# EAGLE board AK9750 Panel - x11 (EAGLE 7.7.0)
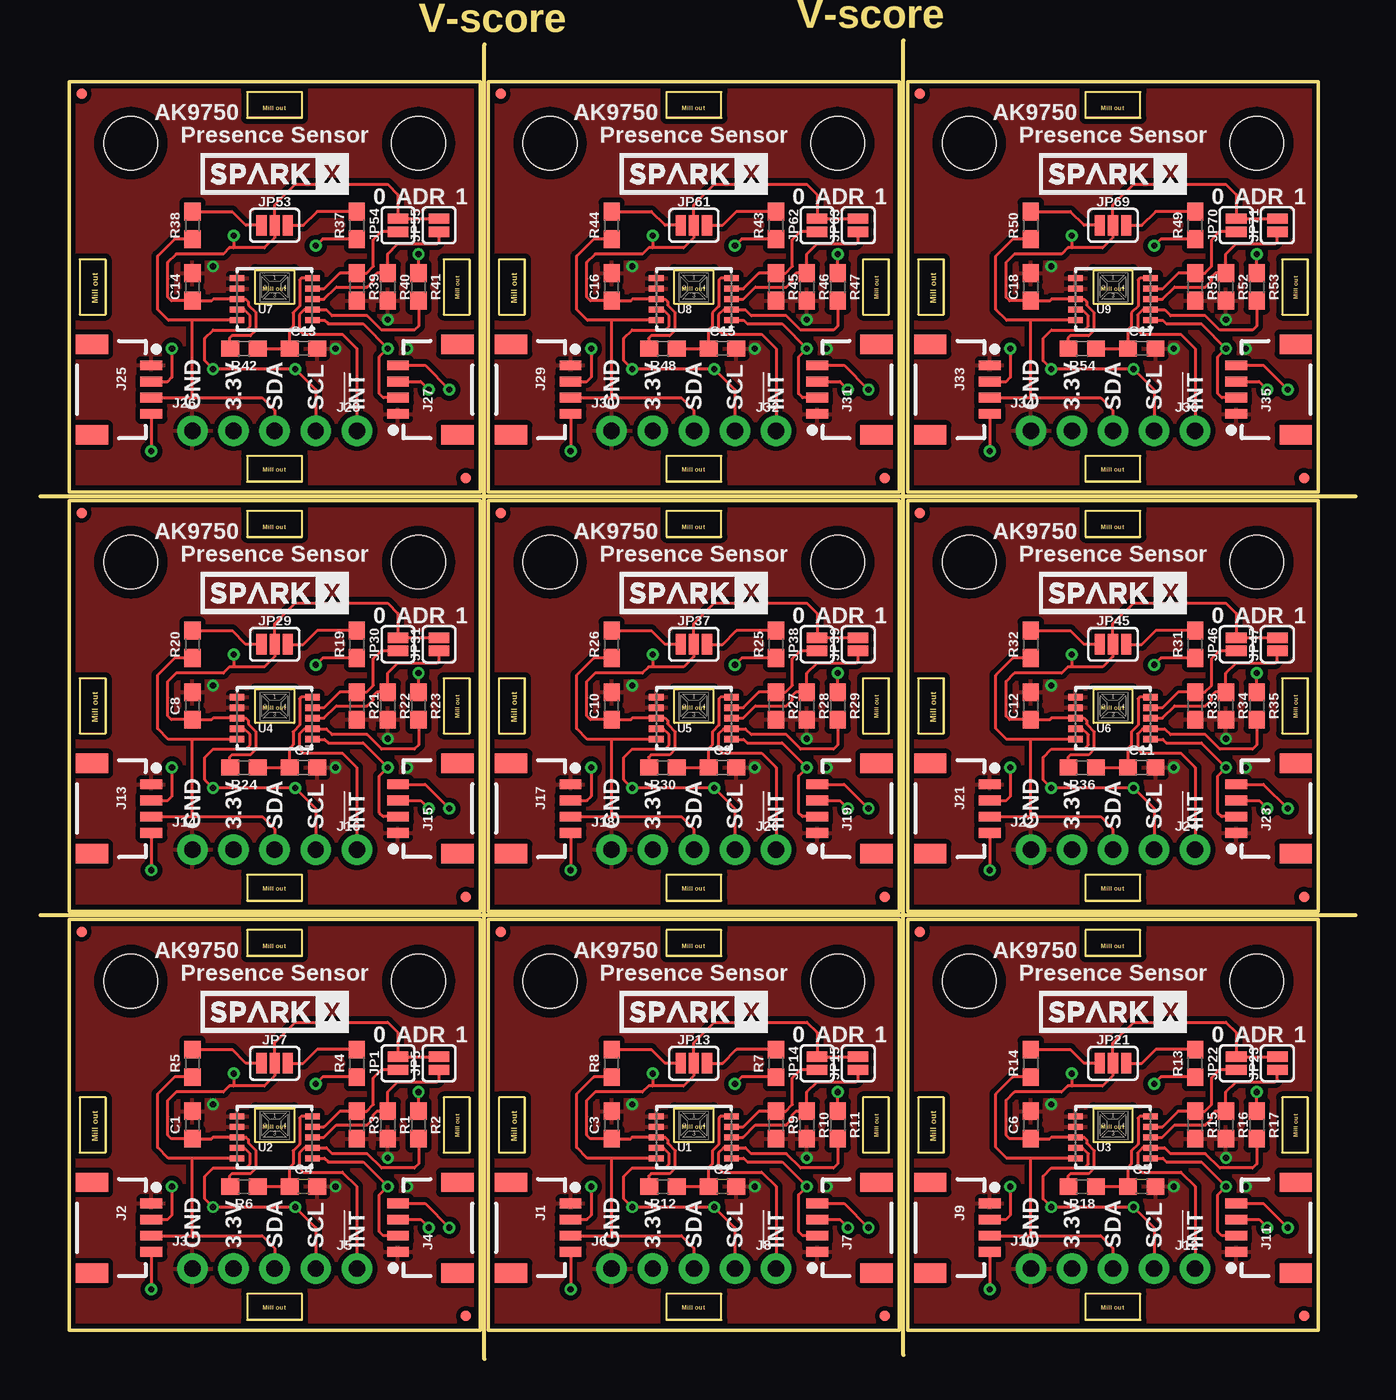
[diagram p0: board, top side]
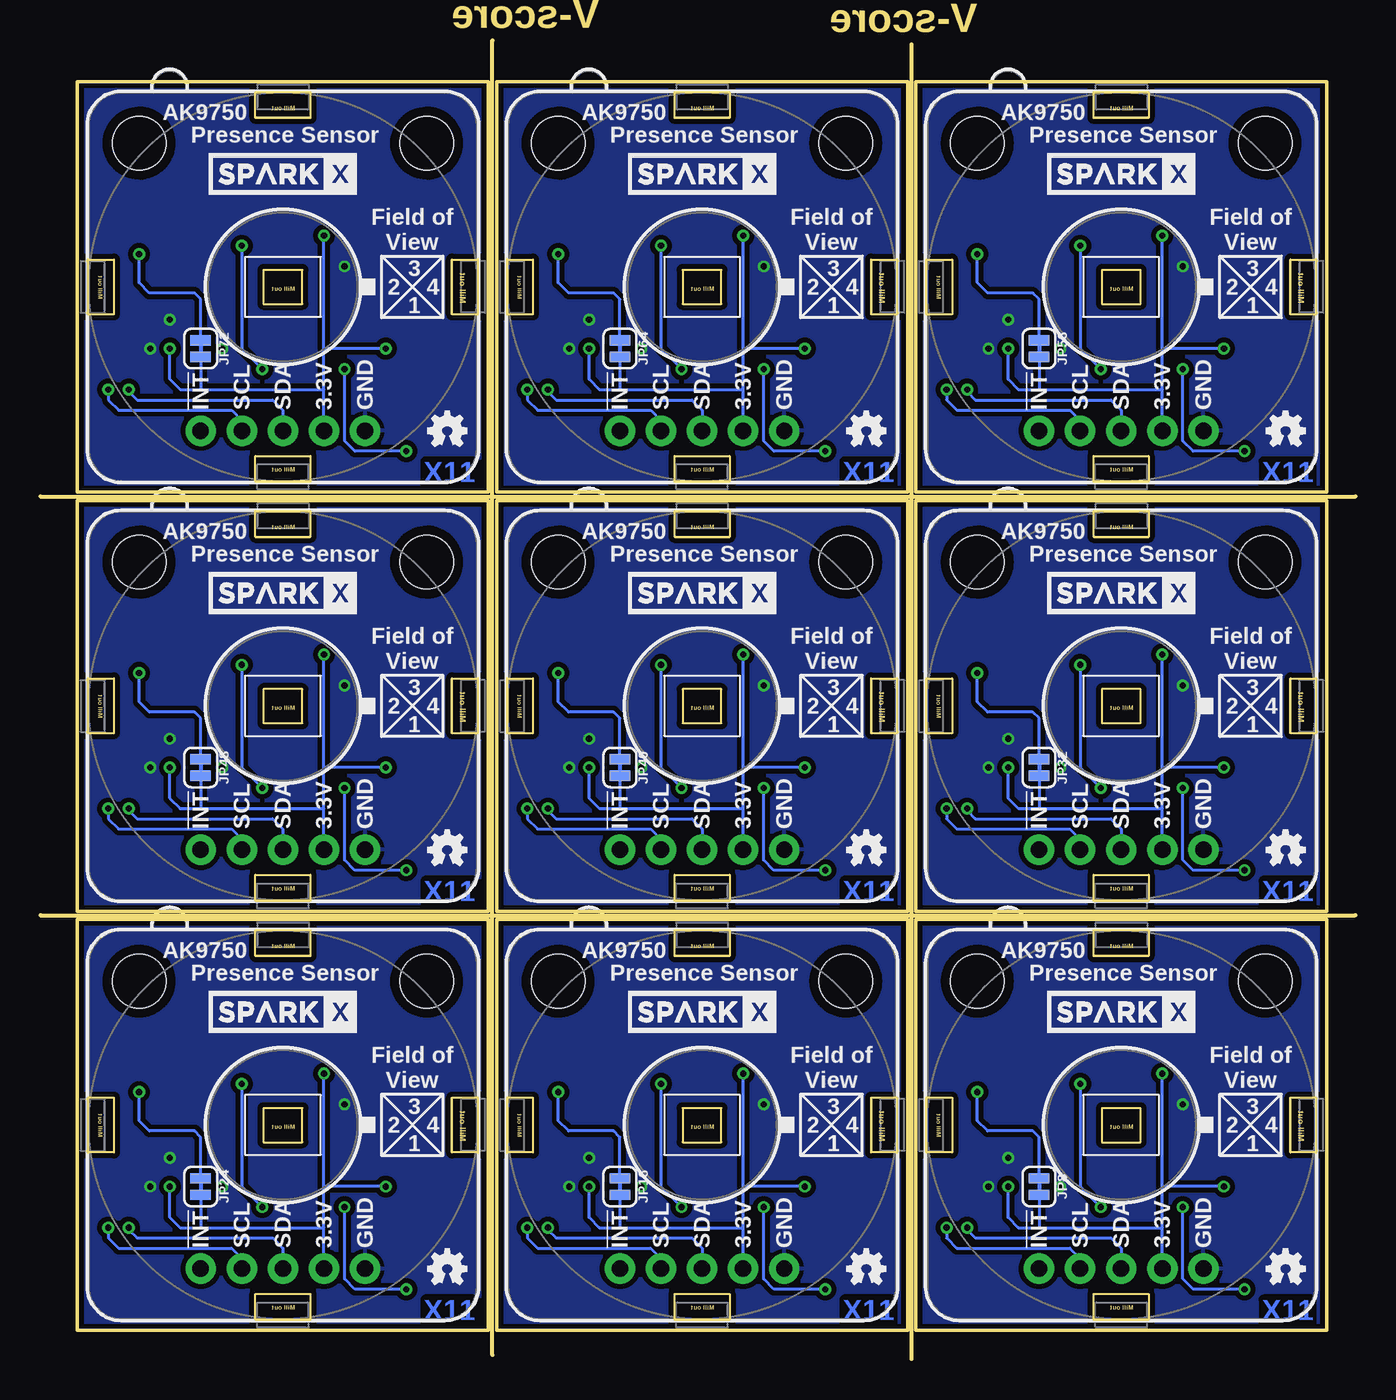
[diagram p1: board, bottom side, seen from below]

Size 81.28 x 81.53 mm. Coordinates in mm from the lower left corner, seen from the top.
Outline: 27.43,0 27.43,81.28
Outline: 53.34,0.25 53.34,81.53
Outline: 81.28,53.34 0,53.34
Outline: 81.28,27.43 0,27.43
Outline: 1.78,1.78 1.78,27.18 27.18,27.18 27.18,1.78 1.78,1.78
Outline: 27.69,1.78 27.69,27.18 53.09,27.18 53.09,1.78 27.69,1.78
Outline: 53.59,1.78 53.59,27.18 78.99,27.18 78.99,1.78 53.59,1.78
Outline: 1.78,27.69 1.78,53.09 27.18,53.09 27.18,27.69 1.78,27.69
Outline: 27.69,27.69 27.69,53.09 53.09,53.09 53.09,27.69 27.69,27.69
Outline: 53.59,27.69 53.59,53.09 78.99,53.09 78.99,27.69 53.59,27.69
Outline: 1.78,53.59 1.78,78.99 27.18,78.99 27.18,53.59 1.78,53.59
Outline: 27.69,53.59 27.69,78.99 53.09,78.99 53.09,53.59 27.69,53.59
Outline: 53.59,53.59 53.59,78.99 78.99,78.99 78.99,53.59 53.59,53.59
Copper layers (1*16): Top 0.035mm / dielectric 1.5mm / Bottom 0.035mm
Design rules "SparkFun-2-layer-TIGHT": minimum track width 7mil, minimum drill 15mil, track to track 7mil, track to pad 7mil, pad to pad 7mil, via to via 7mil, smd to smd 7mil, copper to edge 7mil, drill to drill 7mil, minimum pad ring 7mil, minimum via ring 7mil, stop-mask expansion 4mil, vias tented up to drill 25mil, thermal gap 10mil

## Footprints (pad centres in the part's own frame; a part is rotated, then mirrored left to right if it is on the bottom)
0603 = smd 1.1 x 1: 1 -0.85,0; 2 0.85,0
1X04_1MM_RA = smd 0.6 x 1.35: 1 -1.5,0; 2 -0.5,0; 3 0.5,0; 4 1.5,0 | smd 1.2 x 2: NC1 2.8,-3.675; NC2 -2.8,-3.675
1X04_NO_SILK = drill 1.016 pad 1.88: 1 0,0; 2 2.54,0; 3 5.08,0; 4 7.62,0
1X01_NO_SILK = drill 1.016 pad 1.88: 1 0,0
SMT-JUMPER_2_NO_SILK = smd 0.635 x 1.27: 1 -0.406,0; 2 0.406,0
MICRO-FIDUCIAL = smd 0.635 x 0.635: 1 0,0
STAND-OFF = hole 3.302: 0,0
SMT-JUMPER_3_2-NC_PASTE_SILK = smd 0.635 x 1.27: 1 -0.813,0; 2 0,0; 3 0.813,0
SMT-JUMPER_2_NC_TRACE_SILK = smd 0.635 x 1.27: 1 -0.508,0; 2 0.508,0
SON10 = smd 0.9 x 0.38: 1 2.325,1.3; 2 2.325,0.65; 3 2.325,0; 4 2.325,-0.65; 5 2.325,-1.3; 6 -2.325,-1.3; 7 -2.325,-0.65; 8 -2.325,0; 9 -2.325,0.65; 10 -2.325,1.3

## Placement (x,y rotation side)
C1  1.0uF  [0603]  9.4,14.48 90 top
C2  1.0uF  [0603]  42.16,10.67 0 top
C3  1.0uF  [0603]  35.31,14.48 90 top
C4  1.0uF  [0603]  16.26,10.67 0 top
C5  1.0uF  [0603]  68.07,10.67 0 top
C6  1.0uF  [0603]  61.21,14.48 90 top
C7  1.0uF  [0603]  16.26,36.58 0 top
C8  1.0uF  [0603]  9.4,40.39 90 top
C9  1.0uF  [0603]  42.16,36.58 0 top
C10  1.0uF  [0603]  35.31,40.39 90 top
C11  1.0uF  [0603]  68.07,36.58 0 top
C12  1.0uF  [0603]  61.21,40.39 90 top
C13  1.0uF  [0603]  16.26,62.48 0 top
C14  1.0uF  [0603]  9.4,66.29 90 top
C15  1.0uF  [0603]  42.16,62.48 0 top
C16  1.0uF  [0603]  35.31,66.29 90 top
C17  1.0uF  [0603]  68.07,62.48 0 top
C18  1.0uF  [0603]  61.21,66.29 90 top
J1  SMD  [1X04_1MM_RA]  32.77,8.13 270 top
J2  SMD  [1X04_1MM_RA]  6.86,8.13 270 top
J3  PTH  [1X04_NO_SILK]  9.4,5.59 0 top
J4  SMD  [1X04_1MM_RA]  22.1,8.13 90 top
J5  [1X01_NO_SILK]  19.56,5.59 0 top
J6  PTH  [1X04_NO_SILK]  35.31,5.59 0 top
J7  SMD  [1X04_1MM_RA]  48.01,8.13 90 top
J8  [1X01_NO_SILK]  45.47,5.59 0 top
J9  SMD  [1X04_1MM_RA]  58.67,8.13 270 top
J10  PTH  [1X04_NO_SILK]  61.21,5.59 0 top
J11  SMD  [1X04_1MM_RA]  73.91,8.13 90 top
J12  [1X01_NO_SILK]  71.37,5.59 0 top
J13  SMD  [1X04_1MM_RA]  6.86,34.04 270 top
J14  PTH  [1X04_NO_SILK]  9.4,31.5 0 top
J15  SMD  [1X04_1MM_RA]  22.1,34.04 90 top
J16  [1X01_NO_SILK]  19.56,31.5 0 top
J17  SMD  [1X04_1MM_RA]  32.77,34.04 270 top
J18  PTH  [1X04_NO_SILK]  35.31,31.5 0 top
J19  SMD  [1X04_1MM_RA]  48.01,34.04 90 top
J20  [1X01_NO_SILK]  45.47,31.5 0 top
J21  SMD  [1X04_1MM_RA]  58.67,34.04 270 top
J22  PTH  [1X04_NO_SILK]  61.21,31.5 0 top
J23  SMD  [1X04_1MM_RA]  73.91,34.04 90 top
J24  [1X01_NO_SILK]  71.37,31.5 0 top
J25  SMD  [1X04_1MM_RA]  6.86,59.94 270 top
J26  PTH  [1X04_NO_SILK]  9.4,57.4 0 top
J27  SMD  [1X04_1MM_RA]  22.1,59.94 90 top
J28  [1X01_NO_SILK]  19.56,57.4 0 top
J29  SMD  [1X04_1MM_RA]  32.77,59.94 270 top
J30  PTH  [1X04_NO_SILK]  35.31,57.4 0 top
J31  SMD  [1X04_1MM_RA]  48.01,59.94 90 top
J32  [1X01_NO_SILK]  45.47,57.4 0 top
J33  SMD  [1X04_1MM_RA]  58.67,59.94 270 top
J34  PTH  [1X04_NO_SILK]  61.21,57.4 0 top
J35  SMD  [1X04_1MM_RA]  73.91,59.94 90 top
J36  [1X01_NO_SILK]  71.37,57.4 0 top
JP1  [SMT-JUMPER_2_NO_SILK]  22.1,18.29 90 top
JP2  FIDUCIALUFIDUCIAL  [MICRO-FIDUCIAL]  26.29,2.67 0 top
JP3  STAND-OFF  [STAND-OFF]  5.59,23.37 0 top
JP4  STAND-OFF  [STAND-OFF]  23.37,23.37 0 top
JP5  [SMT-JUMPER_2_NO_SILK]  24.64,18.29 90 top
JP6  FIDUCIALUFIDUCIAL  [MICRO-FIDUCIAL]  2.54,26.42 0 top
JP7  [SMT-JUMPER_3_2-NC_PASTE_SILK]  14.48,18.29 0 top
JP8  [SMT-JUMPER_2_NC_TRACE_SILK]  19.56,10.67 270 bottom
JP9  STAND-OFF  [STAND-OFF]  31.5,23.37 0 top
JP10  STAND-OFF  [STAND-OFF]  49.28,23.37 0 top
JP11  FIDUCIALUFIDUCIAL  [MICRO-FIDUCIAL]  52.2,2.67 0 top
JP12  FIDUCIALUFIDUCIAL  [MICRO-FIDUCIAL]  28.45,26.42 0 top
JP13  [SMT-JUMPER_3_2-NC_PASTE_SILK]  40.39,18.29 0 top
JP14  [SMT-JUMPER_2_NO_SILK]  48.01,18.29 90 top
JP15  [SMT-JUMPER_2_NO_SILK]  50.55,18.29 90 top
JP16  [SMT-JUMPER_2_NC_TRACE_SILK]  45.47,10.67 270 bottom
JP17  STAND-OFF  [STAND-OFF]  57.4,23.37 0 top
JP18  STAND-OFF  [STAND-OFF]  75.18,23.37 0 top
JP19  FIDUCIALUFIDUCIAL  [MICRO-FIDUCIAL]  78.11,2.67 0 top
JP20  FIDUCIALUFIDUCIAL  [MICRO-FIDUCIAL]  54.36,26.42 0 top
JP21  [SMT-JUMPER_3_2-NC_PASTE_SILK]  66.29,18.29 0 top
JP22  [SMT-JUMPER_2_NO_SILK]  73.91,18.29 90 top
JP23  [SMT-JUMPER_2_NO_SILK]  76.45,18.29 90 top
JP24  [SMT-JUMPER_2_NC_TRACE_SILK]  71.37,10.67 270 bottom
JP25  STAND-OFF  [STAND-OFF]  5.59,49.28 0 top
JP26  STAND-OFF  [STAND-OFF]  23.37,49.28 0 top
JP27  FIDUCIALUFIDUCIAL  [MICRO-FIDUCIAL]  26.29,28.57 0 top
JP28  FIDUCIALUFIDUCIAL  [MICRO-FIDUCIAL]  2.54,52.32 0 top
JP29  [SMT-JUMPER_3_2-NC_PASTE_SILK]  14.48,44.2 0 top
JP30  [SMT-JUMPER_2_NO_SILK]  22.1,44.2 90 top
JP31  [SMT-JUMPER_2_NO_SILK]  24.64,44.2 90 top
JP32  [SMT-JUMPER_2_NC_TRACE_SILK]  19.56,36.58 270 bottom
JP33  STAND-OFF  [STAND-OFF]  31.5,49.28 0 top
JP34  STAND-OFF  [STAND-OFF]  49.28,49.28 0 top
JP35  FIDUCIALUFIDUCIAL  [MICRO-FIDUCIAL]  52.2,28.57 0 top
JP36  FIDUCIALUFIDUCIAL  [MICRO-FIDUCIAL]  28.45,52.32 0 top
JP37  [SMT-JUMPER_3_2-NC_PASTE_SILK]  40.39,44.2 0 top
JP38  [SMT-JUMPER_2_NO_SILK]  48.01,44.2 90 top
JP39  [SMT-JUMPER_2_NO_SILK]  50.55,44.2 90 top
JP40  [SMT-JUMPER_2_NC_TRACE_SILK]  45.47,36.58 270 bottom
JP41  STAND-OFF  [STAND-OFF]  57.4,49.28 0 top
JP42  STAND-OFF  [STAND-OFF]  75.18,49.28 0 top
JP43  FIDUCIALUFIDUCIAL  [MICRO-FIDUCIAL]  78.11,28.57 0 top
JP44  FIDUCIALUFIDUCIAL  [MICRO-FIDUCIAL]  54.36,52.32 0 top
JP45  [SMT-JUMPER_3_2-NC_PASTE_SILK]  66.29,44.2 0 top
JP46  [SMT-JUMPER_2_NO_SILK]  73.91,44.2 90 top
JP47  [SMT-JUMPER_2_NO_SILK]  76.45,44.2 90 top
JP48  [SMT-JUMPER_2_NC_TRACE_SILK]  71.37,36.58 270 bottom
JP49  STAND-OFF  [STAND-OFF]  5.59,75.18 0 top
JP50  STAND-OFF  [STAND-OFF]  23.37,75.18 0 top
JP51  FIDUCIALUFIDUCIAL  [MICRO-FIDUCIAL]  26.29,54.48 0 top
JP52  FIDUCIALUFIDUCIAL  [MICRO-FIDUCIAL]  2.54,78.23 0 top
JP53  [SMT-JUMPER_3_2-NC_PASTE_SILK]  14.48,70.1 0 top
JP54  [SMT-JUMPER_2_NO_SILK]  22.1,70.1 90 top
JP55  [SMT-JUMPER_2_NO_SILK]  24.64,70.1 90 top
JP56  [SMT-JUMPER_2_NC_TRACE_SILK]  19.56,62.48 270 bottom
JP57  STAND-OFF  [STAND-OFF]  31.5,75.18 0 top
JP58  STAND-OFF  [STAND-OFF]  49.28,75.18 0 top
JP59  FIDUCIALUFIDUCIAL  [MICRO-FIDUCIAL]  52.2,54.48 0 top
JP60  FIDUCIALUFIDUCIAL  [MICRO-FIDUCIAL]  28.45,78.23 0 top
JP61  [SMT-JUMPER_3_2-NC_PASTE_SILK]  40.39,70.1 0 top
JP62  [SMT-JUMPER_2_NO_SILK]  48.01,70.1 90 top
JP63  [SMT-JUMPER_2_NO_SILK]  50.55,70.1 90 top
JP64  [SMT-JUMPER_2_NC_TRACE_SILK]  45.47,62.48 270 bottom
JP65  STAND-OFF  [STAND-OFF]  57.4,75.18 0 top
JP66  STAND-OFF  [STAND-OFF]  75.18,75.18 0 top
JP67  FIDUCIALUFIDUCIAL  [MICRO-FIDUCIAL]  78.11,54.48 0 top
JP68  FIDUCIALUFIDUCIAL  [MICRO-FIDUCIAL]  54.36,78.23 0 top
JP69  [SMT-JUMPER_3_2-NC_PASTE_SILK]  66.29,70.1 0 top
JP70  [SMT-JUMPER_2_NO_SILK]  73.91,70.1 90 top
JP71  [SMT-JUMPER_2_NO_SILK]  76.45,70.1 90 top
JP72  [SMT-JUMPER_2_NC_TRACE_SILK]  71.37,62.48 270 bottom
LOGO1  OSHW-LOGOMINI  [OSHW-LOGO-MINI]  4.32,5.59 0 bottom
LOGO2  OSHW-LOGOMINI  [OSHW-LOGO-MINI]  30.23,5.59 0 bottom
LOGO3  OSHW-LOGOMINI  [OSHW-LOGO-MINI]  56.13,5.59 0 bottom
LOGO4  OSHW-LOGOMINI  [OSHW-LOGO-MINI]  4.32,31.5 0 bottom
LOGO5  OSHW-LOGOMINI  [OSHW-LOGO-MINI]  30.23,31.5 0 bottom
LOGO6  OSHW-LOGOMINI  [OSHW-LOGO-MINI]  56.13,31.5 0 bottom
LOGO7  OSHW-LOGOMINI  [OSHW-LOGO-MINI]  4.32,57.4 0 bottom
LOGO8  OSHW-LOGOMINI  [OSHW-LOGO-MINI]  30.23,57.4 0 bottom
LOGO9  OSHW-LOGOMINI  [OSHW-LOGO-MINI]  56.13,57.4 0 bottom
R1  10k  [0603]  21.46,14.48 270 top
R2  10k  [0603]  23.37,14.48 270 top
R3  10k  [0603]  19.56,14.48 270 top
R4  4.7k  [0603]  19.56,18.29 90 top
R5  4.7k  [0603]  9.4,18.29 90 top
R6  330  [0603]  12.57,10.67 180 top
R7  4.7k  [0603]  45.47,18.29 90 top
R8  4.7k  [0603]  35.31,18.29 90 top
R9  10k  [0603]  45.47,14.48 270 top
R10  10k  [0603]  47.37,14.48 270 top
R11  10k  [0603]  49.28,14.48 270 top
R12  330  [0603]  38.48,10.67 180 top
R13  4.7k  [0603]  71.37,18.29 90 top
R14  4.7k  [0603]  61.21,18.29 90 top
R15  10k  [0603]  71.37,14.48 270 top
R16  10k  [0603]  73.28,14.48 270 top
R17  10k  [0603]  75.18,14.48 270 top
R18  330  [0603]  64.39,10.67 180 top
R19  4.7k  [0603]  19.56,44.2 90 top
R20  4.7k  [0603]  9.4,44.2 90 top
R21  10k  [0603]  19.56,40.39 270 top
R22  10k  [0603]  21.46,40.39 270 top
R23  10k  [0603]  23.37,40.39 270 top
R24  330  [0603]  12.57,36.58 180 top
R25  4.7k  [0603]  45.47,44.2 90 top
R26  4.7k  [0603]  35.31,44.2 90 top
R27  10k  [0603]  45.47,40.39 270 top
R28  10k  [0603]  47.37,40.39 270 top
R29  10k  [0603]  49.28,40.39 270 top
R30  330  [0603]  38.48,36.58 180 top
R31  4.7k  [0603]  71.37,44.2 90 top
R32  4.7k  [0603]  61.21,44.2 90 top
R33  10k  [0603]  71.37,40.39 270 top
R34  10k  [0603]  73.28,40.39 270 top
R35  10k  [0603]  75.18,40.39 270 top
R36  330  [0603]  64.39,36.58 180 top
R37  4.7k  [0603]  19.56,70.1 90 top
R38  4.7k  [0603]  9.4,70.1 90 top
R39  10k  [0603]  19.56,66.29 270 top
R40  10k  [0603]  21.46,66.29 270 top
R41  10k  [0603]  23.37,66.29 270 top
R42  330  [0603]  12.57,62.48 180 top
R43  4.7k  [0603]  45.47,70.1 90 top
R44  4.7k  [0603]  35.31,70.1 90 top
R45  10k  [0603]  45.47,66.29 270 top
R46  10k  [0603]  47.37,66.29 270 top
R47  10k  [0603]  49.28,66.29 270 top
R48  330  [0603]  38.48,62.48 180 top
R49  4.7k  [0603]  71.37,70.1 90 top
R50  4.7k  [0603]  61.21,70.1 90 top
R51  10k  [0603]  71.37,66.29 270 top
R52  10k  [0603]  73.28,66.29 270 top
R53  10k  [0603]  75.18,66.29 270 top
R54  330  [0603]  64.39,62.48 180 top
U1  AK9750  [SON10]  40.39,13.72 0 top
U2  AK9750  [SON10]  14.48,13.72 0 top
U3  AK9750  [SON10]  66.29,13.72 0 top
U4  AK9750  [SON10]  14.48,39.62 0 top
U5  AK9750  [SON10]  40.39,39.62 0 top
U6  AK9750  [SON10]  66.29,39.62 0 top
U7  AK9750  [SON10]  14.48,65.53 0 top
U8  AK9750  [SON10]  40.39,65.53 0 top
U9  AK9750  [SON10]  66.29,65.53 0 top
U$1  SPARKX-LOGO4  [SPARKX-MEDIUM]  14.48,21.46 0 bottom
U$2  SPARKX-LOGO4  [SPARKX-MEDIUM]  14.48,21.46 0 top
U$3  CWM 0.5 GI V1  [LENS-CWM-0.5-GI-V1]  14.48,14.48 0 bottom
U$4  SPARKX-LOGO4  [SPARKX-MEDIUM]  40.39,21.46 0 top
U$5  SPARKX-LOGO4  [SPARKX-MEDIUM]  40.39,21.46 0 bottom
U$6  CWM 0.5 GI V1  [LENS-CWM-0.5-GI-V1]  40.39,14.48 0 bottom
U$7  SPARKX-LOGO4  [SPARKX-MEDIUM]  66.29,21.46 0 top
U$8  SPARKX-LOGO4  [SPARKX-MEDIUM]  66.29,21.46 0 bottom
U$9  CWM 0.5 GI V1  [LENS-CWM-0.5-GI-V1]  66.29,14.48 0 bottom
U$10  SPARKX-LOGO4  [SPARKX-MEDIUM]  14.48,47.37 0 top
U$11  SPARKX-LOGO4  [SPARKX-MEDIUM]  14.48,47.37 0 bottom
U$12  CWM 0.5 GI V1  [LENS-CWM-0.5-GI-V1]  14.48,40.39 0 bottom
U$13  SPARKX-LOGO4  [SPARKX-MEDIUM]  40.39,47.37 0 top
U$14  SPARKX-LOGO4  [SPARKX-MEDIUM]  40.39,47.37 0 bottom
U$15  CWM 0.5 GI V1  [LENS-CWM-0.5-GI-V1]  40.39,40.39 0 bottom
U$16  SPARKX-LOGO4  [SPARKX-MEDIUM]  66.29,47.37 0 top
U$17  SPARKX-LOGO4  [SPARKX-MEDIUM]  66.29,47.37 0 bottom
U$18  CWM 0.5 GI V1  [LENS-CWM-0.5-GI-V1]  66.29,40.39 0 bottom
U$19  SPARKX-LOGO4  [SPARKX-MEDIUM]  14.48,73.28 0 top
U$20  SPARKX-LOGO4  [SPARKX-MEDIUM]  14.48,73.28 0 bottom
U$21  CWM 0.5 GI V1  [LENS-CWM-0.5-GI-V1]  14.48,66.29 0 bottom
U$22  SPARKX-LOGO4  [SPARKX-MEDIUM]  40.39,73.28 0 top
U$23  SPARKX-LOGO4  [SPARKX-MEDIUM]  40.39,73.28 0 bottom
U$24  CWM 0.5 GI V1  [LENS-CWM-0.5-GI-V1]  40.39,66.29 0 bottom
U$25  SPARKX-LOGO4  [SPARKX-MEDIUM]  66.29,73.28 0 top
U$26  SPARKX-LOGO4  [SPARKX-MEDIUM]  66.29,73.28 0 bottom
U$27  CWM 0.5 GI V1  [LENS-CWM-0.5-GI-V1]  66.29,66.29 0 bottom

## Library data of the parts
C1-C18 = SparkFun-Capacitors; PROD_ID: CAP-00868
J1-J4 J6 J7 J9-J11 J13-J15 J17-J19 J21-J23 J25-J27 J29-J31 J33-J35 U1-U9 U$1 U$2 U$4 U$5 U$7 U$8 U$10 U$11 U$13 U$14 U$16 U$17 U$19 U$20 U$22 U$23 U$25 U$26 = SparkX
J5 J8 J12 J16 J20 J24 J28 J32 J36 = SparkFun-Connectors
JP1 JP5 JP7 JP8 JP13-JP16 JP21-JP24 JP29-JP32 JP37-JP40 JP45-JP48 JP53-JP56 JP61-JP64 JP69-JP72 = SparkFun-Jumpers
JP2-JP4 JP6 JP9-JP12 JP17-JP20 JP25-JP28 JP33-JP36 JP41-JP44 JP49-JP52 JP57-JP60 JP65-JP68 = SparkFun
LOGO1-LOGO9 = SparkFun-Aesthetics
R1-R3 R9-R11 R15-R17 R21-R23 R27-R29 R33-R35 R39-R41 R45-R47 R51-R53 = SparkFun-Resistors; PROD_ID: RES-00824
R4 R5 R7 R8 R13 R14 R19 R20 R25 R26 R31 R32 R37 R38 R43 R44 R49 R50 = SparkFun-Resistors; PROD_ID: RES-07857
R6 R12 R18 R24 R30 R36 R42 R48 R54 = SparkFun-Resistors; PROD_ID: RES-00818
U$3 U$6 U$9 U$12 U$15 U$18 U$21 U$24 U$27 = openPIR-temp

## Nets
3.3V: C1.1 J2.2 J3.2 J4.2 JP1.2 JP5.2 JP7.2 JP8.2 R6.2 U2.5 U2.8
3.3V1: C3.1 J1.2 J6.2 J7.2 JP13.2 JP14.2 JP15.2 JP16.2 R12.2 U1.5 U1.8
3.3V2: C6.1 J9.2 J10.2 J11.2 JP21.2 JP22.2 JP23.2 JP24.2 R18.2 U3.5 U3.8
3.3V3: C8.1 J13.2 J14.2 J15.2 JP29.2 JP30.2 JP31.2 JP32.2 R24.2 U4.5 U4.8
3.3V4: C10.1 J17.2 J18.2 J19.2 JP37.2 JP38.2 JP39.2 JP40.2 R30.2 U5.5 U5.8
3.3V5: C12.1 J21.2 J22.2 J23.2 JP45.2 JP46.2 JP47.2 JP48.2 R36.2 U6.5 U6.8
3.3V6: C14.1 J25.2 J26.2 J27.2 JP53.2 JP54.2 JP55.2 JP56.2 R42.2 U7.5 U7.8
3.3V7: C16.1 J29.2 J30.2 J31.2 JP61.2 JP62.2 JP63.2 JP64.2 R48.2 U8.5 U8.8
3.3V8: C18.1 J33.2 J34.2 J35.2 JP69.2 JP70.2 JP71.2 JP72.2 R54.2 U9.5 U9.8
!INT: J5.1 R2.2 U2.4
!INT1: J8.1 R11.2 U1.4
!INT2: J12.1 R17.2 U3.4
!INT3: J16.1 R23.2 U4.4
!INT4: J20.1 R29.2 U5.4
!INT5: J24.1 R35.2 U6.4
!INT6: J28.1 R41.2 U7.4
!INT7: J32.1 R47.2 U8.4
!INT8: J36.1 R53.2 U9.4
ADR0: JP1.1 R3.1 U2.2
ADR1: JP5.1 R1.1 U2.3
ADR2: JP14.1 R9.1 U1.2
ADR3: JP15.1 R10.1 U1.3
ADR4: JP22.1 R15.1 U3.2
ADR5: JP23.1 R16.1 U3.3
ADR6: JP30.1 R21.1 U4.2
ADR7: JP31.1 R22.1 U4.3
ADR8: JP38.1 R27.1 U5.2
ADR9: JP39.1 R28.1 U5.3
ADR10: JP46.1 R33.1 U6.2
ADR11: JP47.1 R34.1 U6.3
ADR12: JP54.1 R39.1 U7.2
ADR13: JP55.1 R40.1 U7.3
ADR14: JP62.1 R45.1 U8.2
ADR15: JP63.1 R46.1 U8.3
ADR16: JP70.1 R51.1 U9.2
ADR17: JP71.1 R52.1 U9.3
GND9: C1.2 C4.2 J2.1 J3.1 J4.1 R1.2 R3.2 U2.9 U2.10
GND10: C2.2 C3.2 J1.1 J6.1 J7.1 R9.2 R10.2 U1.9 U1.10
GND11: C5.2 C6.2 J9.1 J10.1 J11.1 R15.2 R16.2 U3.9 U3.10
GND12: C7.2 C8.2 J13.1 J14.1 J15.1 R21.2 R22.2 U4.9 U4.10
GND13: C9.2 C10.2 J17.1 J18.1 J19.1 R27.2 R28.2 U5.9 U5.10
GND14: C11.2 C12.2 J21.1 J22.1 J23.1 R33.2 R34.2 U6.9 U6.10
GND15: C13.2 C14.2 J25.1 J26.1 J27.1 R39.2 R40.2 U7.9 U7.10
GND16: C15.2 C16.2 J29.1 J30.1 J31.1 R45.2 R46.2 U8.9 U8.10
GND17: C17.2 C18.2 J33.1 J34.1 J35.1 R51.2 R52.2 U9.9 U9.10
N$1: JP7.1 R5.2
N$2: JP7.3 R4.2
N$3: JP8.1 R2.1
N$4: JP13.1 R8.2
N$5: JP13.3 R7.2
N$6: JP16.1 R11.1
N$7: JP21.1 R14.2
N$8: JP21.3 R13.2
N$9: JP24.1 R17.1
N$10: JP29.1 R20.2
N$11: JP29.3 R19.2
N$12: JP32.1 R23.1
N$13: JP37.1 R26.2
N$14: JP37.3 R25.2
N$15: JP40.1 R29.1
N$16: JP45.1 R32.2
N$17: JP45.3 R31.2
N$18: JP48.1 R35.1
N$19: JP53.1 R38.2
N$20: JP53.3 R37.2
N$21: JP56.1 R41.1
N$22: JP61.1 R44.2
N$23: JP61.3 R43.2
N$24: JP64.1 R47.1
N$25: JP69.1 R50.2
N$26: JP69.3 R49.2
N$27: JP72.1 R53.1
SCL: J2.4 J3.4 J4.4 R4.1 U2.7
SCL1: J1.4 J6.4 J7.4 R7.1 U1.7
SCL2: J9.4 J10.4 J11.4 R13.1 U3.7
SCL3: J13.4 J14.4 J15.4 R19.1 U4.7
SCL4: J17.4 J18.4 J19.4 R25.1 U5.7
SCL5: J21.4 J22.4 J23.4 R31.1 U6.7
SCL6: J25.4 J26.4 J27.4 R37.1 U7.7
SCL7: J29.4 J30.4 J31.4 R43.1 U8.7
SCL8: J33.4 J34.4 J35.4 R49.1 U9.7
SDA: J2.3 J3.3 J4.3 R5.1 U2.6
SDA1: J1.3 J6.3 J7.3 R8.1 U1.6
SDA2: J9.3 J10.3 J11.3 R14.1 U3.6
SDA3: J13.3 J14.3 J15.3 R20.1 U4.6
SDA4: J17.3 J18.3 J19.3 R26.1 U5.6
SDA5: J21.3 J22.3 J23.3 R32.1 U6.6
SDA6: J25.3 J26.3 J27.3 R38.1 U7.6
SDA7: J29.3 J30.3 J31.3 R44.1 U8.6
SDA8: J33.3 J34.3 J35.3 R50.1 U9.6
VDD: C4.1 R6.1 U2.1
VDD1: C2.1 R12.1 U1.1
VDD2: C5.1 R18.1 U3.1
VDD3: C7.1 R24.1 U4.1
VDD4: C9.1 R30.1 U5.1
VDD5: C11.1 R36.1 U6.1
VDD6: C13.1 R42.1 U7.1
VDD7: C15.1 R48.1 U8.1
VDD8: C17.1 R54.1 U9.1

## Tracks (layer width: path | path; a pad name or v marks a point on that pad's centre or on a via)
3.3V  (via drill 0.38)
  Top 0.178: 11.94,16.89 11.68,16.89 11.3,16.51 8.38,16.51 7.87,16 7.87,14.99 | v11.94,17.65 11.94,16.89 | 7.87,14.99 7.87,13.84 8.09,13.63 C1.1 10.58,13.63 10.67,13.72 U2.8 12.7,13.72 12.85,13.56 12.85,13.36 13.34,12.88 13.34,11.81 12.98,11.46 11.84,11.46 11.68,11.3 11.68,10.71 R6.2 | 7.87,14.98 7.87,14.99 | 11.94,16.89 13.84,16.89 14.48,17.53 JP7.2 14.48,19.56 15.75,20.83 21.46,20.83 22.1,20.19 JP1.2 JP5.2 | J4.2 21.2,7.63 20.95,7.87 20.95,10.16 v21.46,10.67 19.94,12.19 17.78,12.19 17.56,12.42 U2.5 | v8.13,10.67 8.13,8.89 7.87,8.63 J2.2
  Bottom 0.178: v21.46,10.67 21.46,8.76 20.83,8.13 19.56,8.13 | J3.2 11.94,8.13 | 11.94,8.13 11.94,10.67 | 11.94,10.67 v11.94,17.65 | 19.56,8.13 11.94,8.13 | 19.56,11.18 19.56,8.13 | v8.13,10.67 11.94,10.67
3.3V1  (via drill 0.38)
  Top 0.178: 37.85,16.89 37.59,16.89 37.21,16.51 34.29,16.51 33.78,16 33.78,14.99 | v37.85,17.65 37.85,16.89 | 33.78,14.99 33.78,13.84 34,13.63 C3.1 36.49,13.63 36.58,13.72 U1.8 38.61,13.72 38.76,13.56 38.76,13.36 39.24,12.88 39.24,11.81 38.89,11.46 37.74,11.46 37.59,11.3 37.59,10.71 R12.2 | 33.77,14.98 33.78,14.99 | 37.85,16.89 39.75,16.89 40.39,17.53 JP13.2 40.39,19.56 41.66,20.83 47.37,20.83 48.01,20.19 JP14.2 JP15.2 | J7.2 47.11,7.63 46.86,7.87 46.86,10.16 v47.37,10.67 45.85,12.19 43.69,12.19 43.46,12.42 U1.5 | v34.04,10.67 34.04,8.89 33.77,8.63 J1.2
  Bottom 0.178: v47.37,10.67 47.37,8.76 46.74,8.13 45.47,8.13 | J6.2 37.85,8.13 | 37.85,8.13 37.85,10.67 | 37.85,10.67 v37.85,17.65 | 45.47,8.13 37.85,8.13 | 45.47,11.18 45.47,8.13 | v34.04,10.67 37.85,10.67
3.3V2  (via drill 0.38)
  Top 0.178: 63.75,16.89 63.5,16.89 63.12,16.51 60.2,16.51 59.69,16 59.69,14.99 | v63.75,17.65 63.75,16.89 | 59.69,14.99 59.69,13.84 59.91,13.63 C6.1 62.4,13.63 62.48,13.72 U3.8 64.52,13.72 64.67,13.56 64.67,13.36 65.15,12.88 65.15,11.81 64.8,11.46 63.65,11.46 63.5,11.3 63.5,10.71 R18.2 | 59.68,14.98 59.69,14.99 | 63.75,16.89 65.66,16.89 66.29,17.53 JP21.2 66.29,19.56 67.56,20.83 73.28,20.83 73.91,20.19 JP22.2 JP23.2 | J11.2 73.02,7.63 72.77,7.87 72.77,10.16 v73.28,10.67 71.76,12.19 69.6,12.19 69.37,12.42 U3.5 | v59.94,10.67 59.94,8.89 59.68,8.63 J9.2
  Bottom 0.178: v73.28,10.67 73.28,8.76 72.64,8.13 71.37,8.13 | J10.2 63.75,8.13 | 63.75,8.13 63.75,10.67 | 63.75,10.67 v63.75,17.65 | 71.37,8.13 63.75,8.13 | 71.37,11.18 71.37,8.13 | v59.94,10.67 63.75,10.67
3.3V3  (via drill 0.38)
  Top 0.178: 11.94,42.8 11.68,42.8 11.3,42.42 8.38,42.42 7.87,41.91 7.87,40.89 | v11.94,43.56 11.94,42.8 | 7.87,40.89 7.87,39.75 8.09,39.54 C8.1 10.58,39.54 10.67,39.62 U4.8 12.7,39.62 12.85,39.47 12.85,39.27 13.34,38.79 13.34,37.72 12.98,37.36 11.84,37.36 11.68,37.21 11.68,36.62 R24.2 | 7.87,40.89 | 11.94,42.8 13.84,42.8 14.48,43.43 JP29.2 14.48,45.47 15.75,46.74 21.46,46.74 22.1,46.1 JP30.2 JP31.2 | J15.2 21.2,33.54 20.95,33.78 20.95,36.07 v21.46,36.58 19.94,38.1 17.78,38.1 17.56,38.32 U4.5 | v8.13,36.58 8.13,34.8 7.87,34.54 J13.2
  Bottom 0.178: v21.46,36.58 21.46,34.67 20.83,34.04 19.56,34.04 | J14.2 11.94,34.04 | 11.94,34.04 11.94,36.58 | 11.94,36.58 v11.94,43.56 | 19.56,34.04 11.94,34.04 | 19.56,37.08 19.56,34.04 | v8.13,36.58 11.94,36.58
3.3V4  (via drill 0.38)
  Top 0.178: 37.85,42.8 37.59,42.8 37.21,42.42 34.29,42.42 33.78,41.91 33.78,40.89 | v37.85,43.56 37.85,42.8 | 33.78,40.89 33.78,39.75 34,39.54 C10.1 36.49,39.54 36.58,39.62 U5.8 38.61,39.62 38.76,39.47 38.76,39.27 39.24,38.79 39.24,37.72 38.89,37.36 37.74,37.36 37.59,37.21 37.59,36.62 R30.2 | 33.77,40.89 33.78,40.89 | 37.85,42.8 39.75,42.8 40.39,43.43 JP37.2 40.39,45.47 41.66,46.74 47.37,46.74 48.01,46.1 JP38.2 JP39.2 | J19.2 47.11,33.54 46.86,33.78 46.86,36.07 v47.37,36.58 45.85,38.1 43.69,38.1 43.46,38.32 U5.5 | v34.04,36.58 34.04,34.8 33.77,34.54 J17.2
  Bottom 0.178: v47.37,36.58 47.37,34.67 46.74,34.04 45.47,34.04 | J18.2 37.85,34.04 | 37.85,34.04 37.85,36.58 | 37.85,36.58 v37.85,43.56 | 45.47,34.04 37.85,34.04 | 45.47,37.08 45.47,34.04 | v34.04,36.58 37.85,36.58
3.3V5  (via drill 0.38)
  Top 0.178: 63.75,42.8 63.5,42.8 63.12,42.42 60.2,42.42 59.69,41.91 59.69,40.89 | v63.75,43.56 63.75,42.8 | 59.69,40.89 59.69,39.75 59.91,39.54 C12.1 62.4,39.54 62.48,39.62 U6.8 64.52,39.62 64.67,39.47 64.67,39.27 65.15,38.79 65.15,37.72 64.8,37.36 63.65,37.36 63.5,37.21 63.5,36.62 R36.2 | 59.68,40.89 59.69,40.89 | 63.75,42.8 65.66,42.8 66.29,43.43 JP45.2 66.29,45.47 67.56,46.74 73.28,46.74 73.91,46.1 JP46.2 JP47.2 | J23.2 73.02,33.54 72.77,33.78 72.77,36.07 v73.28,36.58 71.76,38.1 69.6,38.1 69.37,38.32 U6.5 | v59.94,36.58 59.94,34.8 59.68,34.54 J21.2
  Bottom 0.178: v73.28,36.58 73.28,34.67 72.64,34.04 71.37,34.04 | J22.2 63.75,34.04 | 63.75,34.04 63.75,36.58 | 63.75,36.58 v63.75,43.56 | 71.37,34.04 63.75,34.04 | 71.37,37.08 71.37,34.04 | v59.94,36.58 63.75,36.58
3.3V6  (via drill 0.38)
  Top 0.178: 11.94,68.71 11.68,68.71 11.3,68.33 8.38,68.33 7.87,67.82 7.87,66.8 | v11.94,69.47 11.94,68.71 | 7.87,66.8 7.87,65.66 8.09,65.44 C14.1 10.58,65.44 10.67,65.53 U7.8 12.7,65.53 12.85,65.38 12.85,65.18 13.34,64.69 13.34,63.63 12.98,63.27 11.84,63.27 11.68,63.12 11.68,62.52 R42.2 | 7.87,66.79 7.87,66.8 | 11.94,68.71 13.84,68.71 14.48,69.34 JP53.2 14.48,71.37 15.75,72.64 21.46,72.64 22.1,72.01 JP54.2 JP55.2 | J27.2 21.2,59.44 20.95,59.69 20.95,61.98 v21.46,62.48 19.94,64.01 17.78,64.01 17.56,64.23 U7.5 | v8.13,62.48 8.13,60.71 7.87,60.44 J25.2
  Bottom 0.178: v21.46,62.48 21.46,60.58 20.83,59.94 19.56,59.94 | J26.2 11.94,59.94 | 11.94,59.94 11.94,62.48 | 11.94,62.48 v11.94,69.47 | 19.56,59.94 11.94,59.94 | 19.56,62.99 19.56,59.94 | v8.13,62.48 11.94,62.48
3.3V7  (via drill 0.38)
  Top 0.178: 37.85,68.71 37.59,68.71 37.21,68.33 34.29,68.33 33.78,67.82 33.78,66.8 | v37.85,69.47 37.85,68.71 | 33.78,66.8 33.78,65.66 34,65.44 C16.1 36.49,65.44 36.58,65.53 U8.8 38.61,65.53 38.76,65.38 38.76,65.18 39.24,64.69 39.24,63.63 38.89,63.27 37.74,63.27 37.59,63.12 37.59,62.52 R48.2 | 33.77,66.79 33.78,66.8 | 37.85,68.71 39.75,68.71 40.39,69.34 JP61.2 40.39,71.37 41.66,72.64 47.37,72.64 48.01,72.01 JP62.2 JP63.2 | J31.2 47.11,59.44 46.86,59.69 46.86,61.98 v47.37,62.48 45.85,64.01 43.69,64.01 43.46,64.23 U8.5 | v34.04,62.48 34.04,60.71 33.77,60.44 J29.2
  Bottom 0.178: v47.37,62.48 47.37,60.58 46.74,59.94 45.47,59.94 | J30.2 37.85,59.94 | 37.85,59.94 37.85,62.48 | 37.85,62.48 v37.85,69.47 | 45.47,59.94 37.85,59.94 | 45.47,62.99 45.47,59.94 | v34.04,62.48 37.85,62.48
3.3V8  (via drill 0.38)
  Top 0.178: 63.75,68.71 63.5,68.71 63.12,68.33 60.2,68.33 59.69,67.82 59.69,66.8 | v63.75,69.47 63.75,68.71 | 59.69,66.8 59.69,65.66 59.91,65.44 C18.1 62.4,65.44 62.48,65.53 U9.8 64.52,65.53 64.67,65.38 64.67,65.18 65.15,64.69 65.15,63.63 64.8,63.27 63.65,63.27 63.5,63.12 63.5,62.52 R54.2 | 59.68,66.79 59.69,66.8 | 63.75,68.71 65.66,68.71 66.29,69.34 JP69.2 66.29,71.37 67.56,72.64 73.28,72.64 73.91,72.01 JP70.2 JP71.2 | J35.2 73.02,59.44 72.77,59.69 72.77,61.98 v73.28,62.48 71.76,64.01 69.6,64.01 69.37,64.23 U9.5 | v59.94,62.48 59.94,60.71 59.68,60.44 J33.2
  Bottom 0.178: v73.28,62.48 73.28,60.58 72.64,59.94 71.37,59.94 | J34.2 63.75,59.94 | 63.75,59.94 63.75,62.48 | 63.75,62.48 v63.75,69.47 | 71.37,59.94 63.75,59.94 | 71.37,62.99 71.37,59.94 | v59.94,62.48 63.75,62.48
!INT
  Top 0.178: J5.1 19.56,10.67 18.67,11.56 16.26,11.56 16,11.81 16,12.75 16.32,13.07 U2.4 17.67,13.07 18.03,12.7 20.19,12.7 21.08,11.81 23.11,11.81 23.37,12.07 R2.2
!INT1
  Top 0.178: J8.1 45.47,10.67 44.58,11.56 42.16,11.56 41.91,11.81 41.91,12.75 42.23,13.07 U1.4 43.58,13.07 43.94,12.7 46.1,12.7 46.99,11.81 49.02,11.81 49.28,12.07 R11.2
!INT2
  Top 0.178: J12.1 71.37,10.67 70.48,11.56 68.07,11.56 67.82,11.81 67.82,12.75 68.13,13.07 U3.4 69.48,13.07 69.85,12.7 72.01,12.7 72.9,11.81 74.93,11.81 75.18,12.07 R17.2
!INT3
  Top 0.178: J16.1 19.56,36.58 18.67,37.46 16.26,37.46 16,37.72 16,38.66 16.32,38.97 U4.4 17.67,38.97 18.03,38.61 20.19,38.61 21.08,37.72 23.11,37.72 23.37,37.97 R23.2
!INT4
  Top 0.178: J20.1 45.47,36.58 44.58,37.46 42.16,37.46 41.91,37.72 41.91,38.66 42.23,38.97 U5.4 43.58,38.97 43.94,38.61 46.1,38.61 46.99,37.72 49.02,37.72 49.28,37.97 R29.2
!INT5
  Top 0.178: J24.1 71.37,36.58 70.48,37.46 68.07,37.46 67.82,37.72 67.82,38.66 68.13,38.97 U6.4 69.48,38.97 69.85,38.61 72.01,38.61 72.9,37.72 74.93,37.72 75.18,37.97 R35.2
!INT6
  Top 0.178: J28.1 19.56,62.48 18.67,63.37 16.26,63.37 16,63.63 16,64.57 16.32,64.88 U7.4 17.67,64.88 18.03,64.52 20.19,64.52 21.08,63.63 23.11,63.63 23.37,63.88 R41.2
!INT7
  Top 0.178: J32.1 45.47,62.48 44.58,63.37 42.16,63.37 41.91,63.63 41.91,64.57 42.23,64.88 U8.4 43.58,64.88 43.94,64.52 46.1,64.52 46.99,63.63 49.02,63.63 49.28,63.88 R47.2
!INT8
  Top 0.178: J36.1 71.37,62.48 70.48,63.37 68.07,63.37 67.82,63.63 67.82,64.57 68.13,64.88 U9.4 69.48,64.88 69.85,64.52 72.01,64.52 72.9,63.63 74.93,63.63 75.18,63.88 R53.2
ADR0
  Top 0.178: U2.2 17.54,14.37 18.5,15.33 R3.1 20.15,15.33 20.57,15.75 20.57,17.4 21.06,17.88 JP1.1
ADR1
  Top 0.178: U2.3 17.53,13.72 18.29,14.48 20.19,14.48 20.57,14.86 20.57,15.11 20.79,15.33 R1.1 21.46,16.51 22.1,17.14 24.51,17.14 24.64,17.27 JP5.1
ADR2
  Top 0.178: U1.2 43.45,14.37 44.41,15.33 R9.1 46.06,15.33 46.48,15.75 46.48,17.4 46.96,17.88 JP14.1
ADR3
  Top 0.178: U1.3 43.43,13.72 44.2,14.48 46.1,14.48 46.48,14.86 46.48,15.11 46.7,15.33 R10.1 47.37,16.51 48.01,17.14 50.42,17.14 50.55,17.27 JP15.1
ADR4
  Top 0.178: U3.2 69.36,14.37 70.32,15.33 R15.1 71.97,15.33 72.39,15.75 72.39,17.4 72.87,17.88 JP22.1
ADR5
  Top 0.178: U3.3 69.34,13.72 70.1,14.48 72.01,14.48 72.39,14.86 72.39,15.11 72.61,15.33 R16.1 73.28,16.51 73.91,17.14 76.33,17.14 76.45,17.27 JP23.1
ADR6
  Top 0.178: U4.2 17.54,40.27 18.5,41.24 R21.1 20.15,41.24 20.57,41.66 20.57,43.31 21.06,43.79 JP30.1
ADR7
  Top 0.178: U4.3 17.53,39.62 18.29,40.39 20.19,40.39 20.57,40.77 20.57,41.02 20.79,41.24 R22.1 21.46,42.42 22.1,43.05 24.51,43.05 24.64,43.18 JP31.1
ADR8
  Top 0.178: U5.2 43.45,40.27 44.41,41.24 R27.1 46.06,41.24 46.48,41.66 46.48,43.31 46.96,43.79 JP38.1
ADR9
  Top 0.178: U5.3 43.43,39.62 44.2,40.39 46.1,40.39 46.48,40.77 46.48,41.02 46.7,41.24 R28.1 47.37,42.42 48.01,43.05 50.42,43.05 50.55,43.18 JP39.1
ADR10
  Top 0.178: U6.2 69.36,40.27 70.32,41.24 R33.1 71.97,41.24 72.39,41.66 72.39,43.31 72.87,43.79 JP46.1
ADR11
  Top 0.178: U6.3 69.34,39.62 70.1,40.39 72.01,40.39 72.39,40.77 72.39,41.02 72.61,41.24 R34.1 73.28,42.42 73.91,43.05 76.33,43.05 76.45,43.18 JP47.1
ADR12
  Top 0.178: U7.2 17.54,66.18 18.5,67.14 R39.1 20.15,67.14 20.57,67.56 20.57,69.22 21.06,69.7 JP54.1
ADR13
  Top 0.178: U7.3 17.53,65.53 18.29,66.29 20.19,66.29 20.57,66.68 20.57,66.93 20.79,67.14 R40.1 21.46,68.33 22.1,68.96 24.51,68.96 24.64,69.09 JP55.1
ADR14
  Top 0.178: U8.2 43.45,66.18 44.41,67.14 R45.1 46.06,67.14 46.48,67.56 46.48,69.22 46.96,69.7 JP62.1
ADR15
  Top 0.178: U8.3 43.43,65.53 44.2,66.29 46.1,66.29 46.48,66.68 46.48,66.93 46.7,67.14 R46.1 47.37,68.33 48.01,68.96 50.42,68.96 50.55,69.09 JP63.1
ADR16
  Top 0.178: U9.2 69.36,66.18 70.32,67.14 R51.1 71.97,67.14 72.39,67.56 72.39,69.22 72.87,69.7 JP70.1
ADR17
  Top 0.178: U9.3 69.34,65.53 70.1,66.29 72.01,66.29 72.39,66.68 72.39,66.93 72.61,67.14 R52.1 73.28,68.33 73.91,68.96 76.33,68.96 76.45,69.09 JP71.1
GND9  (via drill 0.38)
  other vias: 10.67,15.75 21.46,12.45 18.24,10.67 22.68,10.67
  pour Bottom (isolate 0.305): 1.78,1.78 1.78,27.18 27.18,27.18 27.18,1.78
  pour Top (isolate 0.305): 1.78,1.78 1.78,27.18 27.18,27.18 27.18,1.78
GND10  (via drill 0.38)
  other vias: 36.58,15.75 47.37,12.45 44.15,10.67 48.59,10.67
  pour Bottom (isolate 0.305): 27.69,1.78 27.69,27.18 53.09,27.18 53.09,1.78
  pour Top (isolate 0.305): 27.69,1.78 27.69,27.18 53.09,27.18 53.09,1.78
GND11  (via drill 0.38)
  other vias: 62.48,15.75 73.28,12.45 70.05,10.67 74.5,10.67
  pour Bottom (isolate 0.305): 53.59,1.78 53.59,27.18 78.99,27.18 78.99,1.78
  pour Top (isolate 0.305): 53.59,1.78 53.59,27.18 78.99,27.18 78.99,1.78
GND12  (via drill 0.38)
  other vias: 10.67,41.66 21.46,38.35 18.24,36.58 22.68,36.58
  pour Bottom (isolate 0.305): 1.78,27.69 1.78,53.09 27.18,53.09 27.18,27.69
  pour Top (isolate 0.305): 1.78,27.69 1.78,53.09 27.18,53.09 27.18,27.69
GND13  (via drill 0.38)
  other vias: 36.58,41.66 47.37,38.35 44.15,36.58 48.59,36.58
  pour Bottom (isolate 0.305): 27.69,27.69 27.69,53.09 53.09,53.09 53.09,27.69
  pour Top (isolate 0.305): 27.69,27.69 27.69,53.09 53.09,53.09 53.09,27.69
GND14  (via drill 0.38)
  other vias: 62.48,41.66 73.28,38.35 70.05,36.58 74.5,36.58
  pour Bottom (isolate 0.305): 53.59,27.69 53.59,53.09 78.99,53.09 78.99,27.69
  pour Top (isolate 0.305): 53.59,27.69 53.59,53.09 78.99,53.09 78.99,27.69
GND15  (via drill 0.38)
  other vias: 10.67,67.56 21.46,64.26 18.24,62.48 22.68,62.48
  pour Bottom (isolate 0.305): 1.78,53.59 1.78,78.99 27.18,78.99 27.18,53.59
  pour Top (isolate 0.305): 1.78,53.59 1.78,78.99 27.18,78.99 27.18,53.59
GND16  (via drill 0.38)
  other vias: 36.58,67.56 47.37,64.26 44.15,62.48 48.59,62.48
  pour Bottom (isolate 0.305): 27.69,53.59 27.69,78.99 53.09,78.99 53.09,53.59
  pour Top (isolate 0.305): 27.69,53.59 27.69,78.99 53.09,78.99 53.09,53.59
GND17  (via drill 0.38)
  other vias: 62.48,67.56 73.28,64.26 70.05,62.48 74.5,62.48
  pour Bottom (isolate 0.305): 53.59,53.59 53.59,78.99 78.99,78.99 78.99,53.59
  pour Top (isolate 0.305): 53.59,53.59 53.59,78.99 78.99,78.99 78.99,53.59
N$1
  Top 0.178: JP7.1 12.7,18.29 11.85,19.14 R5.2
N$2
  Top 0.178: JP7.3 16.26,18.29 17.11,19.14 R4.2
N$3  (via drill 0.38)
  Top 0.178: R2.1 v23.37,16.51
  Bottom 0.178: JP8.1 19.56,13.72 19.94,14.1 22.73,14.1 23.37,14.73 v23.37,16.51
N$4
  Top 0.178: JP13.1 38.61,18.29 37.76,19.14 R8.2
N$5
  Top 0.178: JP13.3 42.16,18.29 43.01,19.14 R7.2
N$6  (via drill 0.38)
  Top 0.178: R11.1 v49.28,16.51
  Bottom 0.178: JP16.1 45.47,13.72 45.85,14.1 48.64,14.1 49.28,14.73 v49.28,16.51
N$7
  Top 0.178: JP21.1 64.52,18.29 63.67,19.14 R14.2
N$8
  Top 0.178: JP21.3 68.07,18.29 68.92,19.14 R13.2
N$9  (via drill 0.38)
  Top 0.178: R17.1 v75.18,16.51
  Bottom 0.178: JP24.1 71.37,13.72 71.76,14.1 74.55,14.1 75.18,14.73 v75.18,16.51
N$10
  Top 0.178: JP29.1 12.7,44.2 11.85,45.05 R20.2
N$11
  Top 0.178: JP29.3 16.26,44.2 17.11,45.05 R19.2
N$12  (via drill 0.38)
  Top 0.178: R23.1 v23.37,42.42
  Bottom 0.178: JP32.1 19.56,39.62 19.94,40 22.73,40 23.37,40.64 v23.37,42.42
N$13
  Top 0.178: JP37.1 38.61,44.2 37.76,45.05 R26.2
N$14
  Top 0.178: JP37.3 42.16,44.2 43.01,45.05 R25.2
N$15  (via drill 0.38)
  Top 0.178: R29.1 v49.28,42.42
  Bottom 0.178: JP40.1 45.47,39.62 45.85,40 48.64,40 49.28,40.64 v49.28,42.42
N$16
  Top 0.178: JP45.1 64.52,44.2 63.67,45.05 R32.2
N$17
  Top 0.178: JP45.3 68.07,44.2 68.92,45.05 R31.2
N$18  (via drill 0.38)
  Top 0.178: R35.1 v75.18,42.42
  Bottom 0.178: JP48.1 71.37,39.62 71.76,40 74.55,40 75.18,40.64 v75.18,42.42
N$19
  Top 0.178: JP53.1 12.7,70.1 11.85,70.95 R38.2
N$20
  Top 0.178: JP53.3 16.26,70.1 17.11,70.95 R37.2
N$21  (via drill 0.38)
  Top 0.178: R41.1 v23.37,68.33
  Bottom 0.178: JP56.1 19.56,65.53 19.94,65.91 22.73,65.91 23.37,66.55 v23.37,68.33
N$22
  Top 0.178: JP61.1 38.61,70.1 37.76,70.95 R44.2
N$23
  Top 0.178: JP61.3 42.16,70.1 43.01,70.95 R43.2
N$24  (via drill 0.38)
  Top 0.178: R47.1 v49.28,68.33
  Bottom 0.178: JP64.1 45.47,65.53 45.85,65.91 48.64,65.91 49.28,66.55 v49.28,68.33
N$25
  Top 0.178: JP69.1 64.52,70.1 63.67,70.95 R50.2
N$26
  Top 0.178: JP69.3 68.07,70.1 68.92,70.95 R49.2
N$27  (via drill 0.38)
  Top 0.178: R53.1 v75.18,68.33
  Bottom 0.178: JP72.1 71.37,65.53 71.76,65.91 74.55,65.91 75.18,66.55 v75.18,68.33
SCL  (via drill 0.38)
  Top 0.178: J4.4 23.77,9.63 v25.27,8.13 | J2.4 v6.86,4.32 | R4.1 17.44,17.44 v17.02,17.02 | J3.4 17.02,8.13 v15.75,9.4 v10.67,9.4 10.16,9.91 10.16,11.3 10.67,11.81 12.7,11.81 12.95,12.07 12.95,12.7 12.59,13.07 U2.7
  Bottom 0.178: J3.4 17.02,6.22 17.65,6.86 24.64,6.86 25.27,7.49 v25.27,8.13 | v6.86,4.32 10.03,4.32 10.67,4.95 v10.67,9.4 | v17.02,17.02 17.02,10.67 v15.75,9.4
SCL1  (via drill 0.38)
  Top 0.178: J7.4 49.68,9.63 v51.18,8.13 | J1.4 v32.77,4.32 | R7.1 43.35,17.44 v42.93,17.02 | J6.4 42.93,8.13 v41.66,9.4 v36.58,9.4 36.07,9.91 36.07,11.3 36.58,11.81 38.61,11.81 38.86,12.07 38.86,12.7 38.5,13.07 U1.7
  Bottom 0.178: J6.4 42.93,6.22 43.56,6.86 50.55,6.86 51.18,7.49 v51.18,8.13 | v32.77,4.32 35.94,4.32 36.58,4.95 v36.58,9.4 | v42.93,17.02 42.93,10.67 v41.66,9.4
SCL2  (via drill 0.38)
  Top 0.178: J11.4 75.59,9.63 v77.09,8.13 | J9.4 v58.67,4.32 | R13.1 69.25,17.44 v68.83,17.02 | J10.4 68.83,8.13 v67.56,9.4 v62.48,9.4 61.98,9.91 61.98,11.3 62.48,11.81 64.52,11.81 64.77,12.07 64.77,12.7 64.4,13.07 U3.7
  Bottom 0.178: J10.4 68.83,6.22 69.47,6.86 76.45,6.86 77.09,7.49 v77.09,8.13 | v58.67,4.32 61.85,4.32 62.48,4.95 v62.48,9.4 | v68.83,17.02 68.83,10.67 v67.56,9.4
SCL3  (via drill 0.38)
  Top 0.178: J15.4 23.77,35.54 v25.27,34.04 | J13.4 v6.86,30.23 | R19.1 17.44,43.35 v17.02,42.93 | J14.4 17.02,34.04 v15.75,35.31 v10.67,35.31 10.16,35.81 10.16,37.21 10.67,37.72 12.7,37.72 12.95,37.97 12.95,38.61 12.59,38.97 U4.7
  Bottom 0.178: J14.4 17.02,32.13 17.65,32.77 24.64,32.77 25.27,33.4 v25.27,34.04 | v6.86,30.23 10.03,30.23 10.67,30.86 v10.67,35.31 | v17.02,42.93 17.02,36.58 v15.75,35.31
SCL4  (via drill 0.38)
  Top 0.178: J19.4 49.68,35.54 v51.18,34.04 | J17.4 v32.77,30.23 | R25.1 43.35,43.35 v42.93,42.93 | J18.4 42.93,34.04 v41.66,35.31 v36.58,35.31 36.07,35.81 36.07,37.21 36.58,37.72 38.61,37.72 38.86,37.97 38.86,38.61 38.5,38.97 U5.7
  Bottom 0.178: J18.4 42.93,32.13 43.56,32.77 50.55,32.77 51.18,33.4 v51.18,34.04 | v32.77,30.23 35.94,30.23 36.58,30.86 v36.58,35.31 | v42.93,42.93 42.93,36.58 v41.66,35.31
SCL5  (via drill 0.38)
  Top 0.178: J23.4 75.59,35.54 v77.09,34.04 | J21.4 v58.67,30.23 | R31.1 69.25,43.35 v68.83,42.93 | J22.4 68.83,34.04 v67.56,35.31 v62.48,35.31 61.98,35.81 61.98,37.21 62.48,37.72 64.52,37.72 64.77,37.97 64.77,38.61 64.4,38.97 U6.7
  Bottom 0.178: J22.4 68.83,32.13 69.47,32.77 76.45,32.77 77.09,33.4 v77.09,34.04 | v58.67,30.23 61.85,30.23 62.48,30.86 v62.48,35.31 | v68.83,42.93 68.83,36.58 v67.56,35.31
SCL6  (via drill 0.38)
  Top 0.178: J27.4 23.77,61.44 v25.27,59.94 | J25.4 v6.86,56.13 | R37.1 17.44,69.25 v17.02,68.83 | J26.4 17.02,59.94 v15.75,61.21 v10.67,61.21 10.16,61.72 10.16,63.12 10.67,63.63 12.7,63.63 12.95,63.88 12.95,64.52 12.59,64.88 U7.7
  Bottom 0.178: J26.4 17.02,58.04 17.65,58.67 24.64,58.67 25.27,59.31 v25.27,59.94 | v6.86,56.13 10.03,56.13 10.67,56.77 v10.67,61.21 | v17.02,68.83 17.02,62.48 v15.75,61.21
SCL7  (via drill 0.38)
  Top 0.178: J31.4 49.68,61.44 v51.18,59.94 | J29.4 v32.77,56.13 | R43.1 43.35,69.25 v42.93,68.83 | J30.4 42.93,59.94 v41.66,61.21 v36.58,61.21 36.07,61.72 36.07,63.12 36.58,63.63 38.61,63.63 38.86,63.88 38.86,64.52 38.5,64.88 U8.7
  Bottom 0.178: J30.4 42.93,58.04 43.56,58.67 50.55,58.67 51.18,59.31 v51.18,59.94 | v32.77,56.13 35.94,56.13 36.58,56.77 v36.58,61.21 | v42.93,68.83 42.93,62.48 v41.66,61.21
SCL8  (via drill 0.38)
  Top 0.178: J35.4 75.59,61.44 v77.09,59.94 | J33.4 v58.67,56.13 | R49.1 69.25,69.25 v68.83,68.83 | J34.4 68.83,59.94 v67.56,61.21 v62.48,61.21 61.98,61.72 61.98,63.12 62.48,63.63 64.52,63.63 64.77,63.88 64.77,64.52 64.4,64.88 U9.7
  Bottom 0.178: J34.4 68.83,58.04 69.47,58.67 76.45,58.67 77.09,59.31 v77.09,59.94 | v58.67,56.13 61.85,56.13 62.48,56.77 v62.48,61.21 | v68.83,68.83 68.83,62.48 v67.56,61.21
SDA  (via drill 0.38)
  Top 0.178: J4.3 23.5,8.63 v24,8.13 | R5.1 8.29,17.44 7.24,16.38 7.24,13.08 7.9,12.42 9.4,12.42 | J3.3 14.48,6.86 13.71,7.63 9.4,7.63 | U2.6 9.4,12.42 | 9.4,7.63 9.4,12.42 | J2.3 9.4,7.63
  Bottom 0.178: J3.3 14.48,6.86 15.11,7.49 23.49,7.49 24,8 v24,8.13
SDA1  (via drill 0.38)
  Top 0.178: J7.3 49.41,8.63 v49.91,8.13 | R8.1 34.2,17.44 33.15,16.38 33.15,13.08 33.81,12.42 35.31,12.42 | J6.3 40.39,6.86 39.62,7.63 35.31,7.63 | U1.6 35.31,12.42 | 35.31,7.63 35.31,12.42 | J1.3 35.31,7.63
  Bottom 0.178: J6.3 40.39,6.86 41.02,7.49 49.4,7.49 49.91,8 v49.91,8.13
SDA2  (via drill 0.38)
  Top 0.178: J11.3 75.32,8.63 v75.82,8.13 | R14.1 60.11,17.44 59.05,16.38 59.05,13.08 59.72,12.42 61.21,12.42 | J10.3 66.29,6.86 65.52,7.63 61.21,7.63 | U3.6 61.21,12.42 | 61.21,7.63 61.21,12.42 | J9.3 61.21,7.63
  Bottom 0.178: J10.3 66.29,6.86 66.93,7.49 75.31,7.49 75.82,8 v75.82,8.13
SDA3  (via drill 0.38)
  Top 0.178: J15.3 23.5,34.54 v24,34.04 | R20.1 8.29,43.35 7.24,42.29 7.24,38.99 7.9,38.32 9.4,38.32 | J14.3 14.48,32.77 13.71,33.54 9.4,33.54 | U4.6 9.4,38.32 | 9.4,33.54 9.4,38.32 | J13.3 9.4,33.54
  Bottom 0.178: J14.3 14.48,32.77 15.11,33.4 23.49,33.4 24,33.91 v24,34.04
SDA4  (via drill 0.38)
  Top 0.178: J19.3 49.41,34.54 v49.91,34.04 | R26.1 34.2,43.35 33.15,42.29 33.15,38.99 33.81,38.32 35.31,38.32 | J18.3 40.39,32.77 39.62,33.54 35.31,33.54 | U5.6 35.31,38.32 | 35.31,33.54 35.31,38.32 | J17.3 35.31,33.54
  Bottom 0.178: J18.3 40.39,32.77 41.02,33.4 49.4,33.4 49.91,33.91 v49.91,34.04
SDA5  (via drill 0.38)
  Top 0.178: J23.3 75.32,34.54 v75.82,34.04 | R32.1 60.11,43.35 59.05,42.29 59.05,38.99 59.72,38.32 61.21,38.32 | J22.3 66.29,32.77 65.52,33.54 61.21,33.54 | U6.6 61.21,38.32 | 61.21,33.54 61.21,38.32 | J21.3 61.21,33.54
  Bottom 0.178: J22.3 66.29,32.77 66.93,33.4 75.31,33.4 75.82,33.91 v75.82,34.04
SDA6  (via drill 0.38)
  Top 0.178: J27.3 23.5,60.44 v24,59.94 | R38.1 8.29,69.25 7.24,68.2 7.24,64.9 7.9,64.23 9.4,64.23 | J26.3 14.48,58.67 13.71,59.44 9.4,59.44 | U7.6 9.4,64.23 | 9.4,59.44 9.4,64.23 | J25.3 9.4,59.44
  Bottom 0.178: J26.3 14.48,58.67 15.11,59.31 23.49,59.31 24,59.82 v24,59.94
SDA7  (via drill 0.38)
  Top 0.178: J31.3 49.41,60.44 v49.91,59.94 | R44.1 34.2,69.25 33.15,68.2 33.15,64.9 33.81,64.23 35.31,64.23 | J30.3 40.39,58.67 39.62,59.44 35.31,59.44 | U8.6 35.31,64.23 | 35.31,59.44 35.31,64.23 | J29.3 35.31,59.44
  Bottom 0.178: J30.3 40.39,58.67 41.02,59.31 49.4,59.31 49.91,59.82 v49.91,59.94
SDA8  (via drill 0.38)
  Top 0.178: J35.3 75.32,60.44 v75.82,59.94 | R50.1 60.11,69.25 59.05,68.2 59.05,64.9 59.72,64.23 61.21,64.23 | J34.3 66.29,58.67 65.52,59.44 61.21,59.44 | U9.6 61.21,64.23 | 61.21,59.44 61.21,64.23 | J33.3 61.21,59.44
  Bottom 0.178: J34.3 66.29,58.67 66.93,59.31 75.31,59.31 75.82,59.82 v75.82,59.94
VDD
  Top 0.178: R6.1 C4.1 15.41,11.85 15.62,12.07 15.62,12.88 16.03,13.28 16.03,14.91 16.13,15.02 U2.1
VDD1
  Top 0.178: R12.1 C2.1 41.31,11.85 41.53,12.07 41.53,12.88 41.93,13.28 41.93,14.91 42.04,15.02 U1.1
VDD2
  Top 0.178: R18.1 C5.1 67.22,11.85 67.44,12.07 67.44,12.88 67.84,13.28 67.84,14.91 67.95,15.02 U3.1
VDD3
  Top 0.178: R24.1 C7.1 15.41,37.76 15.62,37.97 15.62,38.79 16.03,39.19 16.03,40.82 16.13,40.92 U4.1
VDD4
  Top 0.178: R30.1 C9.1 41.31,37.76 41.53,37.97 41.53,38.79 41.93,39.19 41.93,40.82 42.04,40.92 U5.1
VDD5
  Top 0.178: R36.1 C11.1 67.22,37.76 67.44,37.97 67.44,38.79 67.84,39.19 67.84,40.82 67.95,40.92 U6.1
VDD6
  Top 0.178: R42.1 C13.1 15.41,63.67 15.62,63.88 15.62,64.69 16.03,65.1 16.03,66.73 16.13,66.83 U7.1
VDD7
  Top 0.178: R48.1 C15.1 41.31,63.67 41.53,63.88 41.53,64.69 41.93,65.1 41.93,66.73 42.04,66.83 U8.1
VDD8
  Top 0.178: R54.1 C17.1 67.22,63.67 67.44,63.88 67.44,64.69 67.84,65.1 67.84,66.73 67.95,66.83 U9.1

## Text on the board
Bottom: X11 | X11 | X11 | X11 | X11 | X11 | X11 | X11 | X11
Dimension: V-score | V-score | Mill out | Mill out | Mill out | Mill out | Mill out | Mill out | Mill out | Mill out | Mill out | Mill out | Mill out | Mill out | Mill out | Mill out | Mill out | V-score | Mill out | Mill out | Mill out | Mill out | Mill out | Mill out | Mill out | Mill out | Mill out | Mill out | Mill out | Mill out | Mill out | Mill out | Mill out | V-score | Mill out | Mill out | Mill out | Mill out | Mill out | Mill out | Mill out | Mill out | Mill out | Mill out | Mill out | Mill out | Mill out | Mill out | Mill out
tPlace: AK9750 | AK9750 | AK9750 | Presence Sensor | Presence Sensor | Presence Sensor | 0 | ADR | 1 | 0 | ADR | 1 | 0 | ADR | 1 | GND | 3.3V | SDA | SCL | !INT | GND | 3.3V | SDA | SCL | !INT | GND | 3.3V | SDA | SCL | !INT | AK9750 | AK9750 | AK9750 | Presence Sensor | Presence Sensor | Presence Sensor | 0 | ADR | 1 | 0 | ADR | 1 | 0 | ADR | 1 | GND | 3.3V | SDA | SCL | !INT | GND | 3.3V | SDA | SCL | !INT | GND | 3.3V | SDA | SCL | !INT | AK9750 | AK9750 | AK9750 | Presence Sensor | Presence Sensor | Presence Sensor | 0 | ADR | 1 | 0 | ADR | 1 | 0 | ADR | 1 | GND | 3.3V | SDA | SCL | !INT | GND | 3.3V | SDA | SCL | !INT | GND | 3.3V | SDA | SCL | !INT
bPlace: AK9750 | AK9750 | AK9750 | Presence Sensor | Presence Sensor | Presence Sensor | Field of / View | Field of / View | Field of / View | 3 | 3 | 3 | 4 | 2 | 4 | 2 | 4 | 2 | 1 | 1 | 1 | GND | 3.3V | SDA | SCL | !INT | GND | 3.3V | SDA | SCL | !INT | GND | 3.3V | SDA | SCL | !INT | AK9750 | AK9750 | AK9750 | Presence Sensor | Presence Sensor | Presence Sensor | Field of / View | Field of / View | Field of / View | 3 | 3 | 3 | 4 | 2 | 4 | 2 | 4 | 2 | 1 | 1 | 1 | GND | 3.3V | SDA | SCL | !INT | GND | 3.3V | SDA | SCL | !INT | GND | 3.3V | SDA | SCL | !INT | AK9750 | AK9750 | AK9750 | Presence Sensor | Presence Sensor | Presence Sensor | Field of / View | Field of / View | Field of / View | 3 | 3 | 3 | 4 | 2 | 4 | 2 | 4 | 2 | 1 | 1 | 1 | GND | 3.3V | SDA | SCL | !INT | GND | 3.3V | SDA | SCL | !INT | GND | 3.3V | SDA | SCL | !INT